# EAGLE board display_tabs2 (EAGLE 5.02)
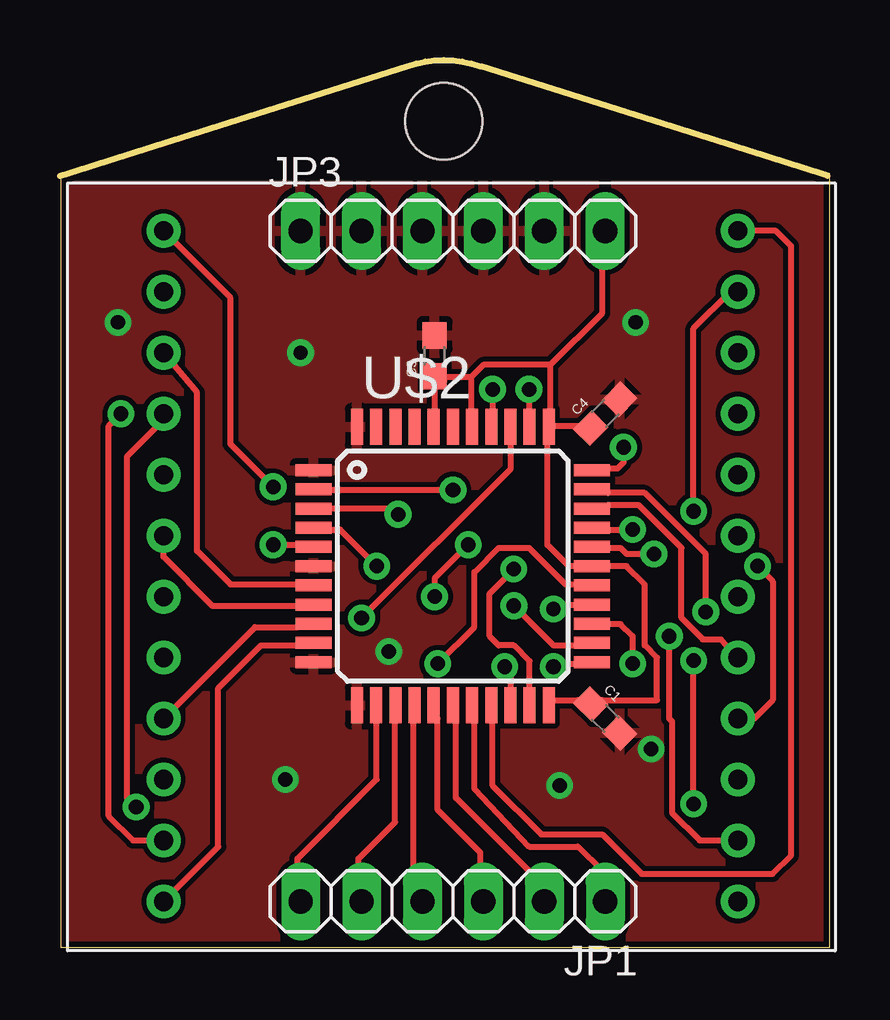
[diagram p0: board, top side]
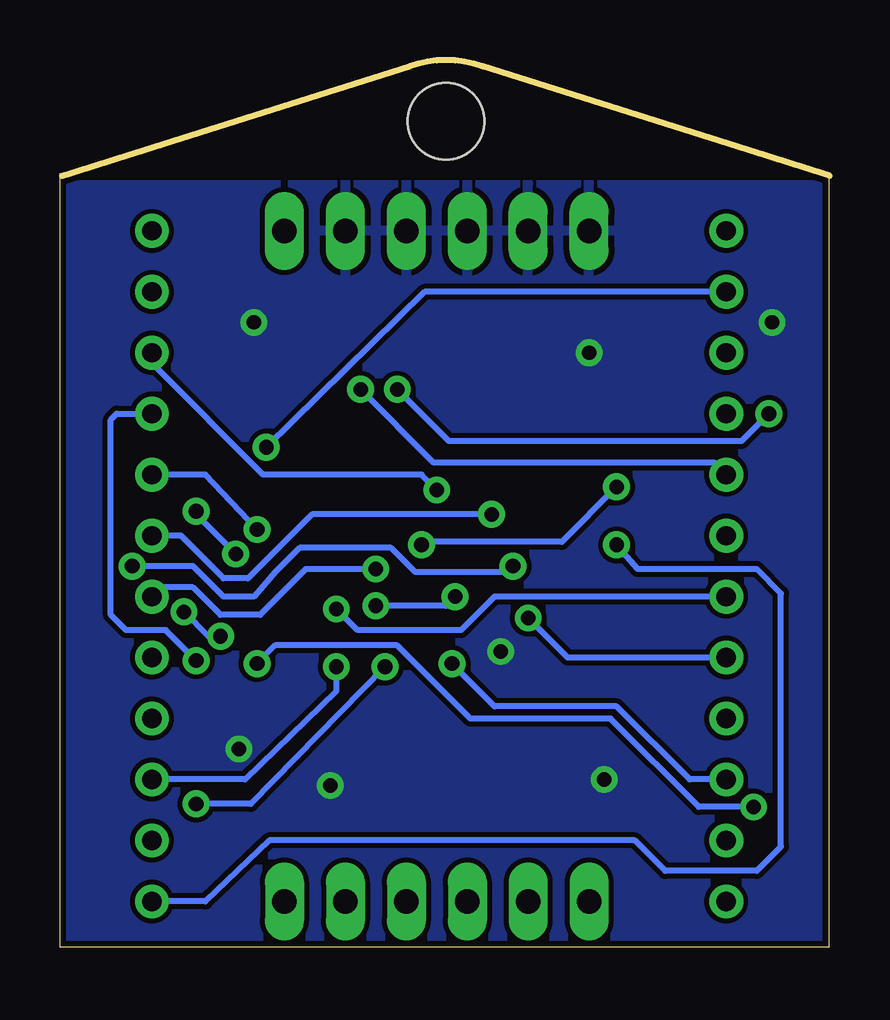
[diagram p1: board, bottom side, seen from below]

Size 32.09 x 36.96 mm. Coordinates in mm from the lower left corner, seen from the top.
Outline: 32.09,32.25 32.09,0 0.04,0 0.04,31.99
Outline: 0,32.13 14.48,36.7 arc-39 17.53,36.7 32,32.13
Copper layers (1*16): Top 0.035mm / dielectric 1.5mm / Bottom 0.035mm
Design rules "SparkFun": minimum track width 8mil, minimum drill 20mil, track to track 8mil, track to pad 8mil, pad to pad 8mil, via to via 8mil, smd to smd 8mil, copper to edge 10mil, drill to drill 8mil, minimum pad ring 12mil, minimum via ring 10mil, stop-mask expansion 4mil, vias tented up to drill 25mil, thermal gap 10mil
Holes 3.2 mm at 16,34.41

## Footprints (pad centres in the part's own frame; a part is rotated, then mirrored left to right if it is on the bottom)
0603 = smd 1.1 x 1: 1 -0.85,0; 2 0.85,0
1X06 = drill 1.016 long: 1 -6.35,0; 2 -3.81,0; 3 -1.27,0; 4 1.27,0; 5 3.81,0; 6 6.35,0
FYM-12881ABXX = drill 0.8 round: P$1 0,0; P$2 0,-2.54; P$3 0,-5.08; P$4 0,-7.62; P$5 0,-10.16; P$6 0,-12.7; P$7 0,-15.24; P$8 0,-17.78; P$9 0,-20.32; P$10 0,-22.86; P$11 0,-25.4; P$12 0,-27.94; P$13 23.94,-27.94; P$14 23.94,-25.4; P$15 23.94,-22.86; P$16 23.94,-20.32; P$17 23.94,-17.78; P$18 23.94,-15.24; P$19 23.94,-12.7; P$20 23.94,-10.16; P$21 23.94,-7.62; P$22 23.94,-5.08; P$23 23.94,-2.54; P$24 23.94,0
TQFP44 = smd 1.5 x 0.5: 1 -5.8,4; 2 -5.8,3.2; 3 -5.8,2.4; 4 -5.8,1.6; 5 -5.8,0.8; 6 -5.8,0; 7 -5.8,-0.8; 8 -5.8,-1.6; 9 -5.8,-2.4; 10 -5.8,-3.2; 11 -5.8,-4; 23 5.8,-4; 24 5.8,-3.2; 25 5.8,-2.4; 26 5.8,-1.6; 27 5.8,-0.8; 28 5.8,0; 29 5.8,0.8; 30 5.8,1.6; 31 5.8,2.4; 32 5.8,3.2; 33 5.8,4 | smd 0.5 x 1.5: 12 -4,-5.8; 13 -3.2,-5.8; 14 -2.4,-5.8; 15 -1.6,-5.8; 16 -0.8,-5.8; 17 0,-5.8; 18 0.8,-5.8; 19 1.6,-5.8; 20 2.4,-5.8; 21 3.2,-5.8; 22 4,-5.8; 34 4,5.8; 35 3.2,5.8; 36 2.4,5.8; 37 1.6,5.8; 38 0.8,5.8; 39 0,5.8; 40 -0.8,5.8; 41 -1.6,5.8; 42 -2.4,5.8; 43 -3.2,5.8; 44 -4,5.8

## Placement (x,y rotation side)
C1  [0603]  22.73,9.52 315 top
C3  [0603]  15.62,24.63 90 top
C4  [0603]  22.73,22.22 45 top
JP1  [1X06]  16.38,1.9 180 top
JP3  [1X06]  16.38,29.84 0 top
U$1  FYM-1228AXX  [FYM-12881ABXX]  4.32,29.84 0 top
U$2  MAX6960  [TQFP44]  16.38,15.87 0 top

## Library data of the parts
C1 C3 C4 = SparkFun
JP1 JP3 = pinhead
U$1 = john
U$2 = maxim

## Nets
CLK: JP1.2 U$2.17
CS: JP1.5 U$2.14
DIN: JP1.4 U$2.15
DOUT: JP1.3 U$2.16
GND: C1.2 C3.2 C4.2 JP3.1 JP3.2 JP3.3 JP3.4 JP3.5 U$2.1 U$2.6 U$2.11 U$2.12 U$2.44
N$1: U$1.P$24 U$2.19
N$2: U$1.P$21 U$2.20
N$3: U$1.P$18 U$2.21
N$4: U$1.P$15 U$2.23
N$5: U$1.P$1 U$2.24
N$6: U$1.P$4 U$2.25
N$7: U$1.P$7 U$2.26
N$8: U$1.P$10 U$2.27
N$9: U$1.P$23 U$2.29
N$10: U$1.P$20 U$2.30
N$11: U$1.P$17 U$2.31
N$12: U$1.P$14 U$2.32
N$13: U$1.P$2 U$2.33
N$14: U$1.P$5 U$2.35
N$15: U$1.P$8 U$2.36
N$16: U$1.P$11 U$2.37
OSC: JP1.6 U$2.13
ROW1: U$1.P$22 U$2.2
ROW2: U$1.P$19 U$2.3
ROW3: U$1.P$16 U$2.4
ROW4: U$1.P$13 U$2.5
ROW5: U$1.P$3 U$2.7
ROW6: U$1.P$6 U$2.8
ROW7: U$1.P$9 U$2.9
ROW8: U$1.P$12 U$2.10
RST: JP1.1 U$2.18
VCC: C1.1 C3.1 C4.1 JP3.6 U$2.22 U$2.28 U$2.34 U$2.38 U$2.40

## Tracks (layer width: path | path; a pad name or v marks a point on that pad's centre or on a via)
CLK
  Top 0.254: U$2.17 16.51,9.52 16.51,6.22 20.07,2.66 20.07,2.28 JP1.2
CS
  Top 0.254: U$2.14 13.97,9.52 13.97,5.2 12.45,3.68 12.45,2.66 JP1.5
DIN
  Top 0.254: U$2.15 14.73,9.52 14.73,3.17 JP1.4
DOUT
  Top 0.254: U$2.16 15.75,9.52 15.75,5.71 17.53,3.93 17.53,2.92 JP1.3
GND  (via drill 0.6)
  other vias: 24,26.03 9.4,6.98 24.64,8.25 13.72,12.31 20.83,6.73 2.41,26.03 10.03,24.76
  pour Bottom: 0.51,31.74 32.26,31.74 32.26,-0.01 0.51,-0.01
  pour Top: 0.51,31.74 32.26,31.74 32.26,-0.01 0.51,-0.01
N$1
  Top 0.254: U$2.19 18.03,9.52 18.03,6.73 20.07,4.69 22.61,4.69 24.26,3.04 29.72,3.04 30.48,3.81 30.48,29.2 29.84,29.84 U$1.P$24
N$2  (via drill 0.61)
  Top 0.254: v18.54,11.68 18.8,11.3 18.8,10.79 U$2.20 | v26.42,5.96 v26.42,11.93
  Bottom 0.254: v18.54,11.68 24.13,5.96 v26.42,5.96 | v26.42,11.93 27.69,13.2 29.34,13.2 29.97,13.84 29.97,21.97 29.72,22.22 U$1.P$21
N$3  (via drill 0.6)
  Top 0.254: U$2.21 19.58,11.91 18.92,12.57 18.29,12.57 17.91,12.95 17.91,14.73 v18.92,15.74
  Bottom 0.254: v18.92,15.74 21.84,15.74 23.75,13.84 25.4,13.84 26.54,14.98 27.94,14.98 28.32,14.6 U$1.P$18
N$4  (via drill 0.61)
  Top 0.254: v20.57,11.68 20.7,11.81 21.59,11.81 U$2.23
  Bottom 0.254: v20.57,11.68 20.57,10.66 24.38,6.98 U$1.P$15
N$5  (via drill 0.61)
  Top 0.254: v18.92,14.22 20.57,12.57 21.59,12.57 U$2.24 | v17.02,16.76 15.62,15.36 v15.62,14.6 | v8.89,19.17 7.11,20.95 7.11,27.05 U$1.P$1
  Bottom 0.254: v15.62,14.6 16,14.22 v18.92,14.22 | v17.02,16.76 16.76,16.89 11.18,16.89 v8.89,19.17
N$6  (via drill 0.61)
  Top 0.254: v23.88,11.81 23.88,12.95 23.37,13.46 22.1,13.46 U$2.25 | v3.17,5.84 2.79,6.22 2.79,20.44 4.32,21.97 | 4.32,21.97 4.32,21.84 | 4.32,21.97 U$1.P$4
  Bottom 0.254: v23.88,11.81 23.11,12.57 18.03,12.57 14.99,9.52 9.14,9.52 5.46,5.84 v3.17,5.84
N$7  (via drill 0.6)
  Top 0.254: U$2.26 20.75,14.27 v20.57,14.09
  Bottom 0.254: v20.57,14.09 19.68,13.2 15.37,13.2 13.97,14.6 U$1.P$7
N$8  (via drill 0.61)
  Top 0.254: v15.75,11.81 17.27,13.33 17.27,15.62 18.29,16.63 19.56,16.63 21.08,15.11 21.97,15.11 U$2.27
  Bottom 0.254: v15.75,11.81 13.97,10.03 8.89,10.03 5.84,6.98 U$1.P$10
N$9  (via drill 0.61)
  Top 0.254: v24.77,16.38 23.62,16.38 23.37,16.63 22.86,16.63 U$2.29 | v26.42,18.16 26.42,25.78 27.94,27.3 U$1.P$23
  Bottom 0.254: v24.77,16.38 26.42,18.03 v26.42,18.16
N$10  (via drill 0.61)
  Top 0.254: U$2.30 22.22,17.52 22.35,17.39 v23.88,17.39
  Bottom 0.254: v23.88,17.39 26.04,19.68 U$1.P$20
N$11
  Top 0.254: U$2.31 22.86,18.41 24.13,18.41 25.91,16.63 25.91,13.71 26.8,12.82 27.56,12.82 U$1.P$17
N$12  (via drill 0.61)
  Top 0.254: v26.92,13.96 26.92,16.38 24.38,18.92 22.86,18.92 U$2.32 | v25.4,12.95 25.4,9.52 25.53,9.39 25.53,5.58 26.67,4.44 U$1.P$14
  Bottom 0.254: v26.92,13.96 25.91,12.95 v25.4,12.95
N$13  (via drill 0.61)
  Top 0.254: v23.5,20.82 23.5,20.19 23.24,19.93 22.86,19.93 U$2.33
  Bottom 0.254: v23.5,20.82 16.89,27.3 U$1.P$2
N$14  (via drill 0.61)
  Top 0.254: v19.56,23.24 19.56,22.22 U$2.35
  Bottom 0.254: v19.56,23.24 16.51,20.19 4.83,20.19 U$1.P$5
N$15  (via drill 0.61)
  Top 0.254: v12.57,13.71 18.8,19.93 18.8,20.95 U$2.36
  Bottom 0.254: v12.57,13.71 10.92,12.06 U$1.P$8
N$16  (via drill 0.61)
  Top 0.254: v18.03,23.24 18.03,22.22 U$2.37 | v2.54,22.22 2.03,21.71 2.03,5.46 3.05,4.44 U$1.P$11
  Bottom 0.254: v18.03,23.24 15.88,21.08 3.68,21.08 v2.54,22.22
OSC
  Top 0.254: U$2.13 13.21,9.52 13.21,6.98 9.91,3.68 9.91,2.66 JP1.6
ROW1  (via drill 0.61)
  Top 0.254: v16.38,19.04 10.92,19.04 U$2.2
  Bottom 0.254: v16.38,19.04 17.02,19.68 23.62,19.68 28.19,24.25 28.19,24.63 U$1.P$22
ROW2  (via drill 0.61)
  Top 0.254: v14.1,18.03 13.84,18.28 10.79,18.28 U$2.3
  Bottom 0.254: v14.1,18.03 21.59,18.03 24.26,15.36 25.27,15.36 27.05,17.14 U$1.P$19
ROW3  (via drill 0.61)
  Top 0.254: v13.21,15.87 11.68,17.39 11.18,17.39 U$2.4 | v29.08,15.87 29.72,15.23 29.72,10.28 28.96,9.52 U$1.P$16
  Bottom 0.254: v13.21,15.87 13.46,15.62 17.27,15.62 18.29,16.63 22.1,16.63 23.11,15.62 24,14.6 25.27,14.6 26.54,15.87 v29.08,15.87
ROW4  (via drill 0.61)
  Top 0.254: v8.89,16.76 9.91,16.76 U$2.5
  Bottom 0.254: v8.89,16.76 8,15.74 3.05,15.74 2.03,14.73 2.03,4.19 3.05,3.17 6.86,3.17 8.13,4.44 23.37,4.44 26.04,1.9 U$1.P$13
ROW5
  Top 0.254: U$2.7 10.54,15.11 9.91,15.11 7.11,15.11 5.71,16.5 5.71,23.11 U$1.P$3
ROW6
  Top 0.254: U$2.8 10.03,14.22 6.35,14.22 4.32,16.25 U$1.P$6
ROW7
  Top 0.254: U$1.P$9 8.13,13.33 9.91,13.33 U$2.9
ROW8
  Top 0.254: U$1.P$12 6.6,4.19 6.6,10.79 8.38,12.57 9.91,12.57 U$2.10
RST
  Top 0.254: U$2.18 17.27,9.52 17.27,6.6 19.56,4.19 21.59,4.19 22.61,3.17 22.61,2.15 JP1.1
VCC
  Top 0.254: U$2.40 15.62,22.22 C3.1 16,23.53 16,23.74 17.14,23.74 | 17.14,23.74 17.14,22.22 U$2.38 | U$2.22 20.57,10.28 21.59,10.28 C1.1 22.61,10.28 24.89,10.28 24.89,12.06 24.38,12.57 24.38,15.11 23.62,15.87 U$2.28 21.21,15.87 20.32,16.76 20.32,20.95 U$2.34 | C4.1 21.59,21.71 20.57,21.71 U$2.34 | 17.14,23.74 17.65,24.25 20.45,24.25 | 20.45,24.25 20.45,22.22 U$2.34 | 20.45,24.25 22.61,26.41 22.61,29.71 JP3.6